# EAGLE board Esquema (EAGLE 9.6.2)
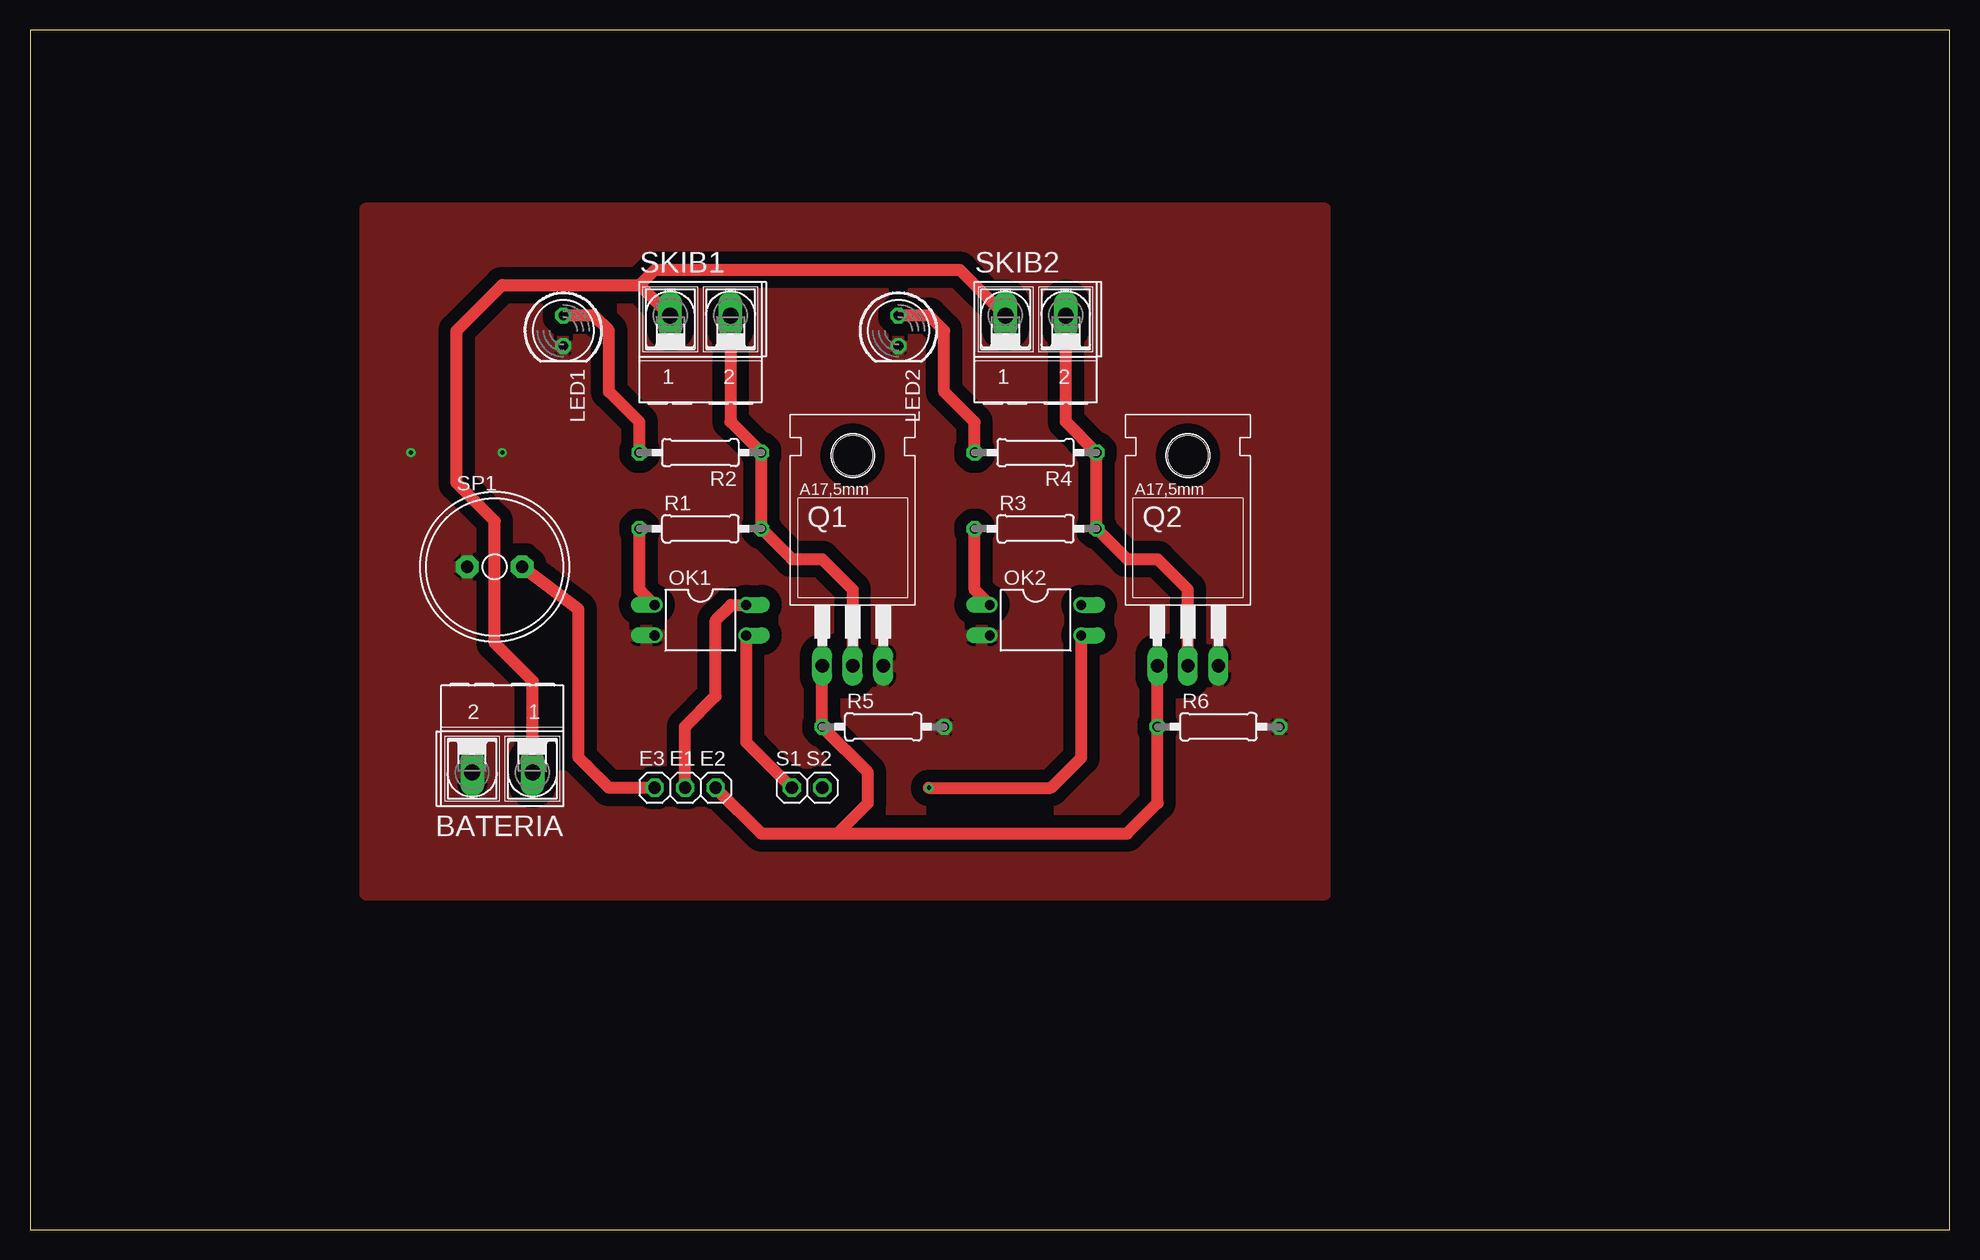
[diagram p0: board, top side]
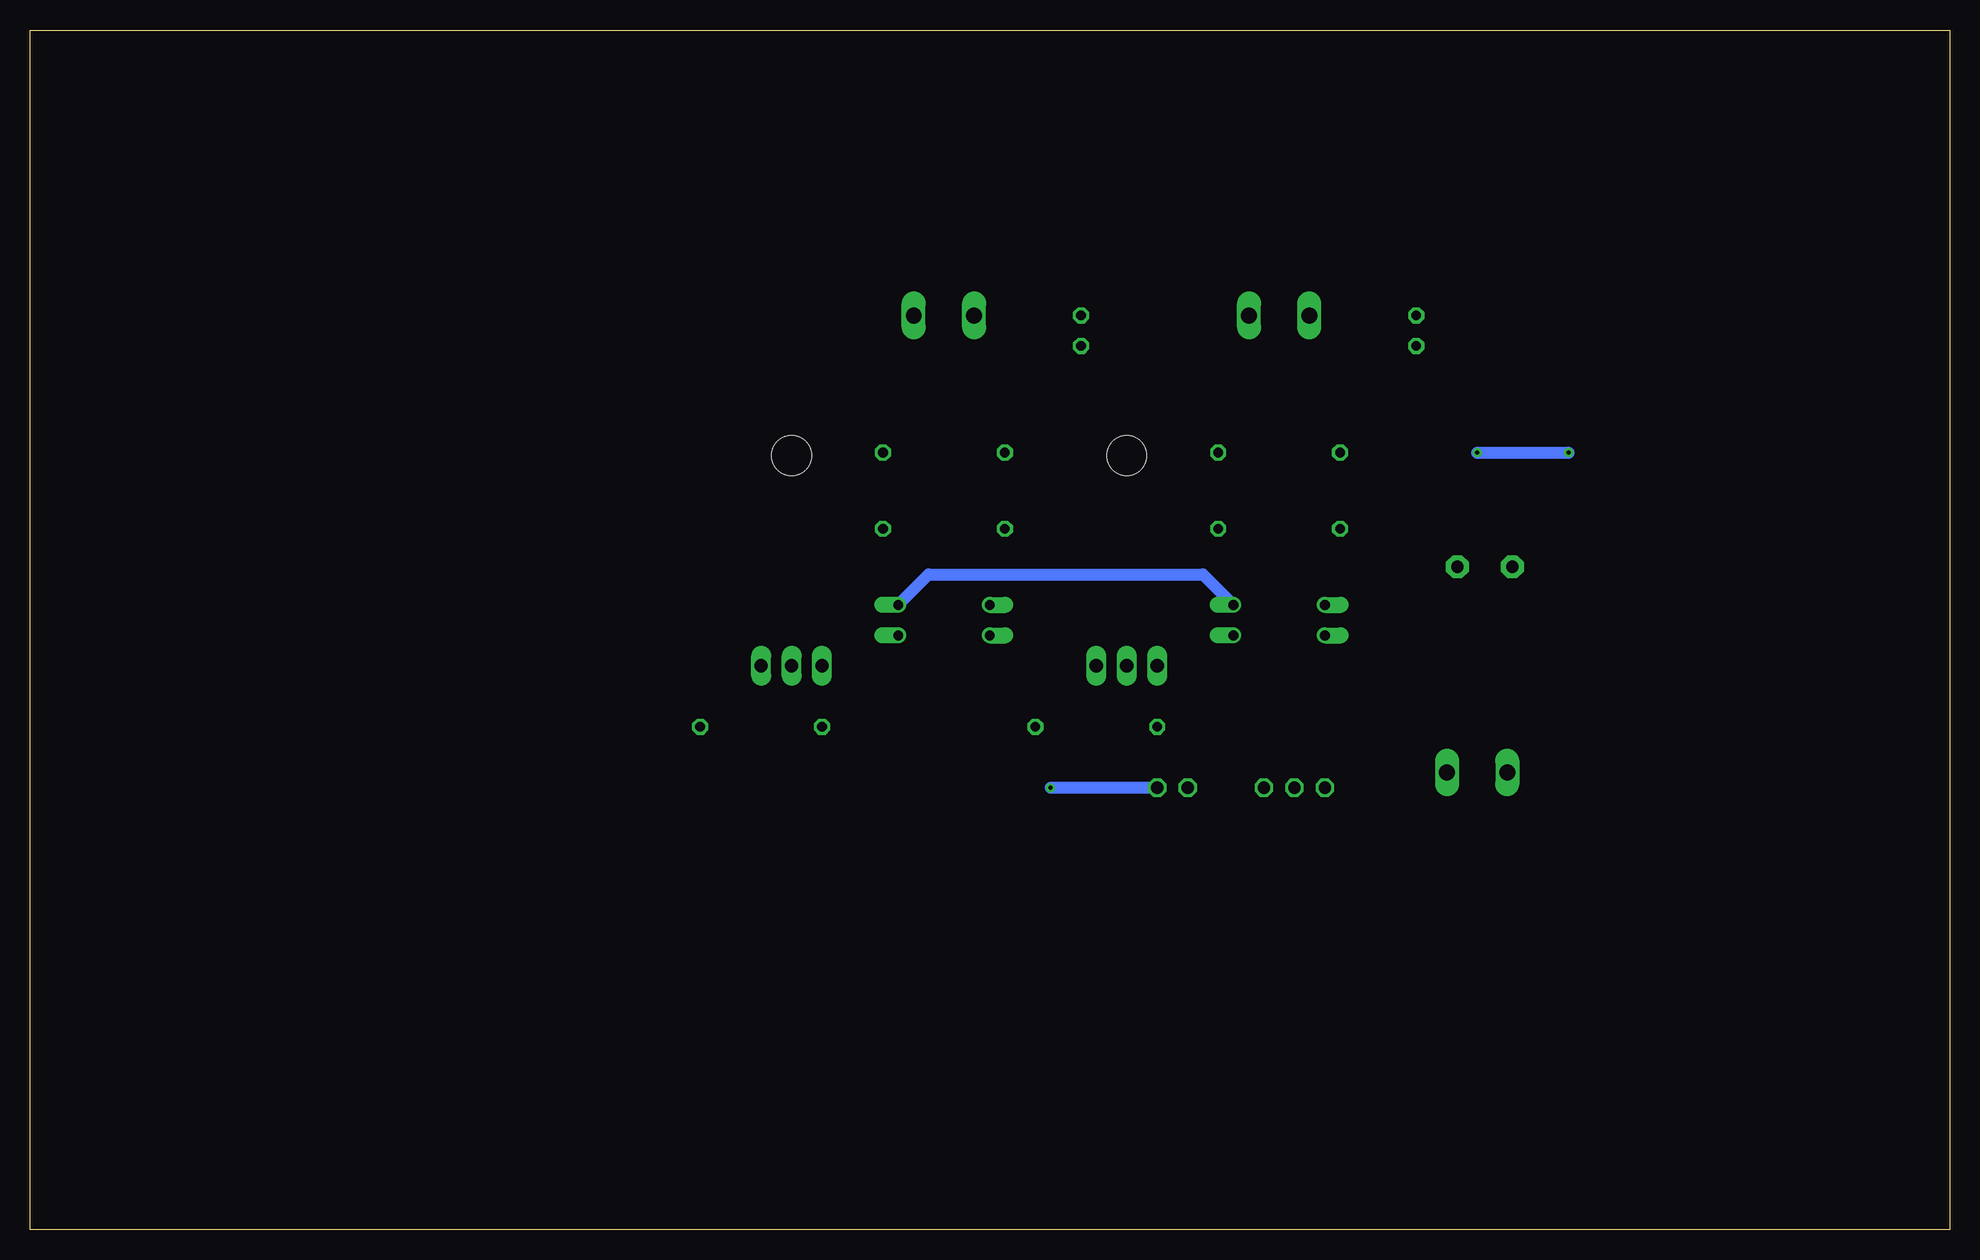
[diagram p1: board, bottom side, seen from below]

Size 160 x 100 mm. Coordinates in mm from the lower left corner, seen from the top.
Outline: 0,0 160,0 160,100 0,100 0,0
Copper layers (1*16): Top 0.035mm / dielectric 1.5mm / Bottom 0.035mm
Design rules "default *": minimum track width 1mm, minimum drill 0.35mm, track to track 40mil, track to pad 0.5mm, pad to pad 6mil, via to via 6mil, smd to smd 6mil, copper to edge 40mil, drill to drill 6mil, minimum pad ring 10mil, minimum via ring 8mil, stop-mask expansion 4mil, vias tented up to drill 0mil, thermal gap 10mil

## Footprints (pad centres in the part's own frame; a part is rotated, then mirrored left to right if it is on the bottom)
AK500/2-H = drill 1.321 long: 1 -2.515,0; 2 2.515,0
1X01 = drill 1.016 octagon: 1 0,0
LED5MM = drill 0.813 octagon: A -1.27,0; K 1.27,0
DIL04 = drill 0.813 offset: 1 -1.27,-3.81; 2 1.27,-3.81; 3 1.27,3.81; 4 -1.27,3.81
TO220 = drill 1.118 long: 1 -2.54,-6.35; 2 0,-6.35; 3 2.54,-6.35 | hole 3.302: 0,11.176
0207/10 = drill 0.813 octagon: 1 -5.08,0; 2 5.08,0
AL11P = drill 1.016 pad 1.905 octagon: + 2.286,0; - -2.286,0

## Placement (x,y rotation side)
BATERIA  [AK500/2-H]  39.37,38.1 180 top
E1  [1X01]  54.61,36.83 0 top
E2  [1X01]  57.15,36.83 0 top
E3  [1X01]  52.07,36.83 0 top
LED1  [LED5MM]  44.45,74.93 270 top
LED2  [LED5MM]  72.39,74.93 270 top
OK1  PC817  [DIL04]  55.88,50.8 270 top
OK2  PC817  [DIL04]  83.82,50.8 270 top
Q1  IRF540  [TO220]  68.58,53.34 0 top
Q2  IRF540  [TO220]  96.52,53.34 0 top
R1  1k  [0207/10]  55.88,58.42 0 top
R2  1k  [0207/10]  55.88,64.77 180 top
R3  1k  [0207/10]  83.82,58.42 0 top
R4  1k  [0207/10]  83.82,64.77 180 top
R5  1k  [0207/10]  71.12,41.91 0 top
R6  1k  [0207/10]  99.06,41.91 0 top
S1  [1X01]  63.5,36.83 0 top
S2  [1X01]  66.04,36.83 0 top
SKIB1  [AK500/2-H]  55.88,76.2 0 top
SKIB2  [AK500/2-H]  83.82,76.2 0 top
SP1  AL11P  [AL11P]  38.73,55.24 0 top

## Library data of the parts
BATERIA SKIB1 SKIB2 = con-ptr500; OC_FARNELL: unknown; OC_NEWARK: unknown
E1-E3 S1 S2 = pinhead
LED1 LED2 = led
OK1 OK2 = optocoupler; MPN: PC817X4J000F; OC_FARNELL: 9707727; OC_NEWARK: 97K7059
Q1 Q2 = transistor-fet
R1-R6 = rcl; SPICEPREFIX: R
SP1 = buzzer; OC_FARNELL: unknown; OC_NEWARK: unknown

## Nets
3.3V: E1.1 OK1.4 OK2.4
BUZZER: E3.1 SP1.+
GND: BATERIA.2 LED1.K LED2.K OK1.2 OK2.2 Q1.3 Q2.3 R5.2 R6.2 SP1.-
N$1: OK1.1 R1.1
N$2: OK2.1 R3.1
N$3: LED2.A R4.2
N$4: LED1.A R2.2
PARACHUTE: E2.1 Q1.1 Q2.1 R5.1 R6.1
SINAL_SKIB1: OK1.3 S1.1
SINAL_SKIB2: OK2.3 S2.1
SKIB1: Q1.2 R1.2 R2.1 SKIB1.2
SKIB2: Q2.2 R3.2 R4.1 SKIB2.2
VCC: BATERIA.1 SKIB1.1 SKIB2.1

## Tracks (layer width: path | path; a pad name or v marks a point on that pad's centre or on a via)
3.3V
  Top 1: E1.1 54.59,36.85 54.59,41.91 57.12,44.45 57.15,44.45 57.15,50.8 58.42,52.07 OK1.4
  Bottom 1: OK1.4 62.23,54.61 85.09,54.61 OK2.4
BUZZER
  Top 1: E3.1 48.26,36.83 45.72,39.37 45.72,51.69 SP1.+
GND  (via drill 0.35)
  Bottom 1: v39.37,64.77 v31.75,64.77
  pour Top: 27.94,85.09 27.94,27.94 107.95,27.94 107.95,85.09
N$1
  Top 1: R1.1 50.8,53.34 50.9,53.24 OK1.1
N$2
  Top 1: OK2.1 78.74,53.34 R3.1
N$3
  Top 1: R4.2 78.74,67.31 76.2,69.85 76.2,74.93 74.93,76.2 LED2.A
N$4
  Top 1: R2.2 50.8,67.31 48.26,69.85 48.26,74.93 46.99,76.2 LED1.A
PARACHUTE
  Top 1: E2.1 60.96,33.02 67.31,33.02 | 67.31,33.02 69.85,35.56 69.85,38.1 R5.1 Q1.1 | Q2.1 R6.1 93.98,35.56 91.44,33.02 67.31,33.02
SINAL_SKIB1
  Top 1: S1.1 60.33,40.01 59.74,40.59 59.69,40.64 OK1.3
SINAL_SKIB2  (via drill 0.35)
  Top 1: OK2.3 87.63,39.37 85.09,36.83 v74.93,36.83
  Bottom 1: S2.1 v74.93,36.83
SKIB1
  Top 1: Q1.2 68.58,53.34 66.04,55.88 63.5,55.88 R1.2 R2.1 58.4,67.33 SKIB1.2
SKIB2
  Top 1: Q2.2 96.52,53.34 93.98,55.88 91.44,55.88 R3.2 R4.1 86.33,67.33 SKIB2.2
VCC
  Top 1: BATERIA.1 41.91,38.12 41.91,45.72 38.73,48.9 38.73,59.05 35.56,62.23 35.56,74.93 39.37,78.74 50.83,78.74 | SKIB1.1 50.83,78.74 | 50.83,78.74 52.09,80.01 77.5,80.01 SKIB2.1